# Altium PCB RevC.PcbDoc (part 1 of 2)
Units mm, origin at the board's own origin, x right, y up, seen from the top; angles counter-clockwise.
Board outline 80 x 88.52 mm, 2 copper layers (Top Layer, Bottom Layer); 116 components, 77 nets, 532 pads, 209 vias.
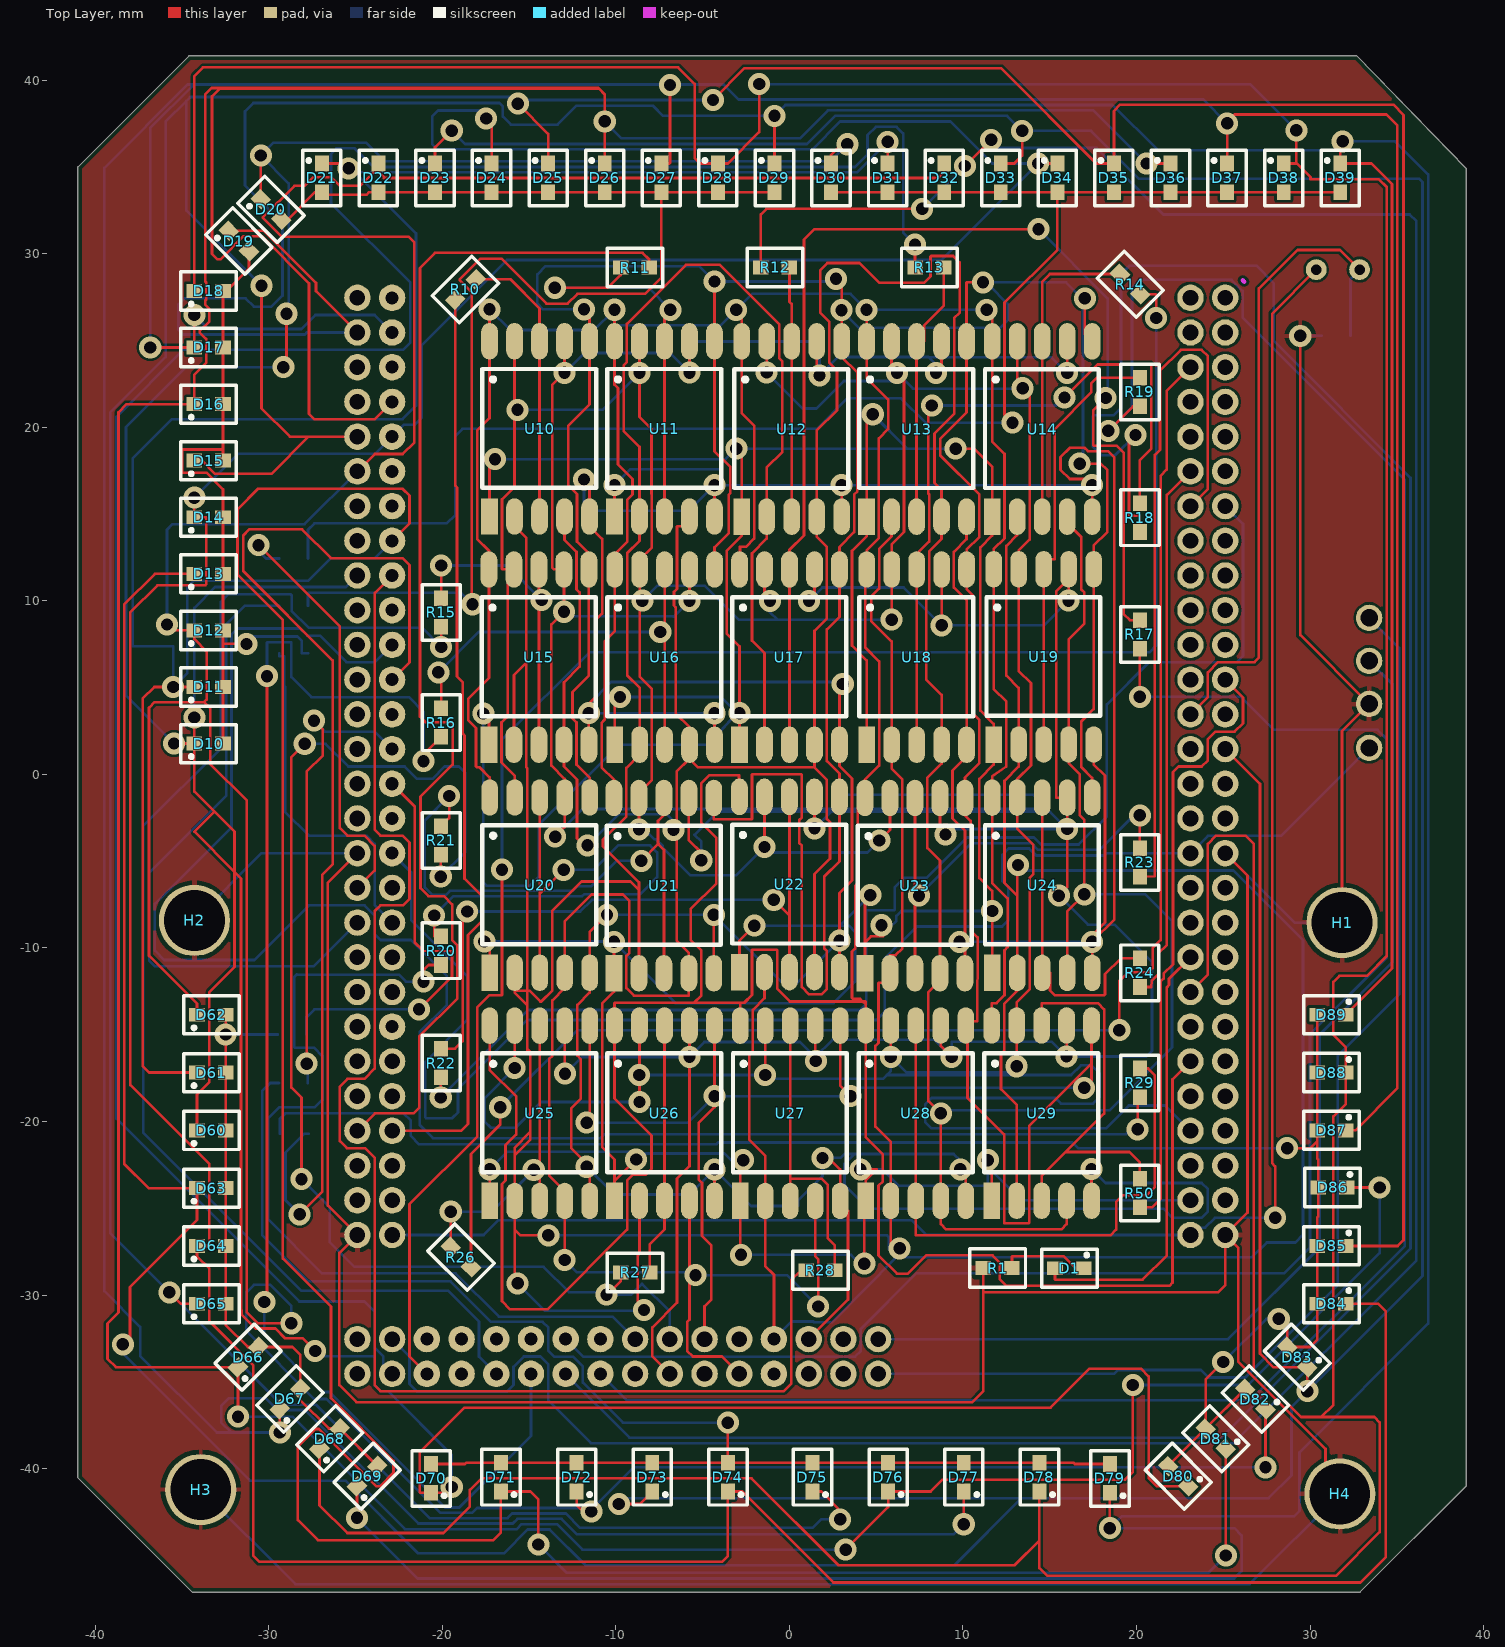
[diagram p0: Top Layer view]
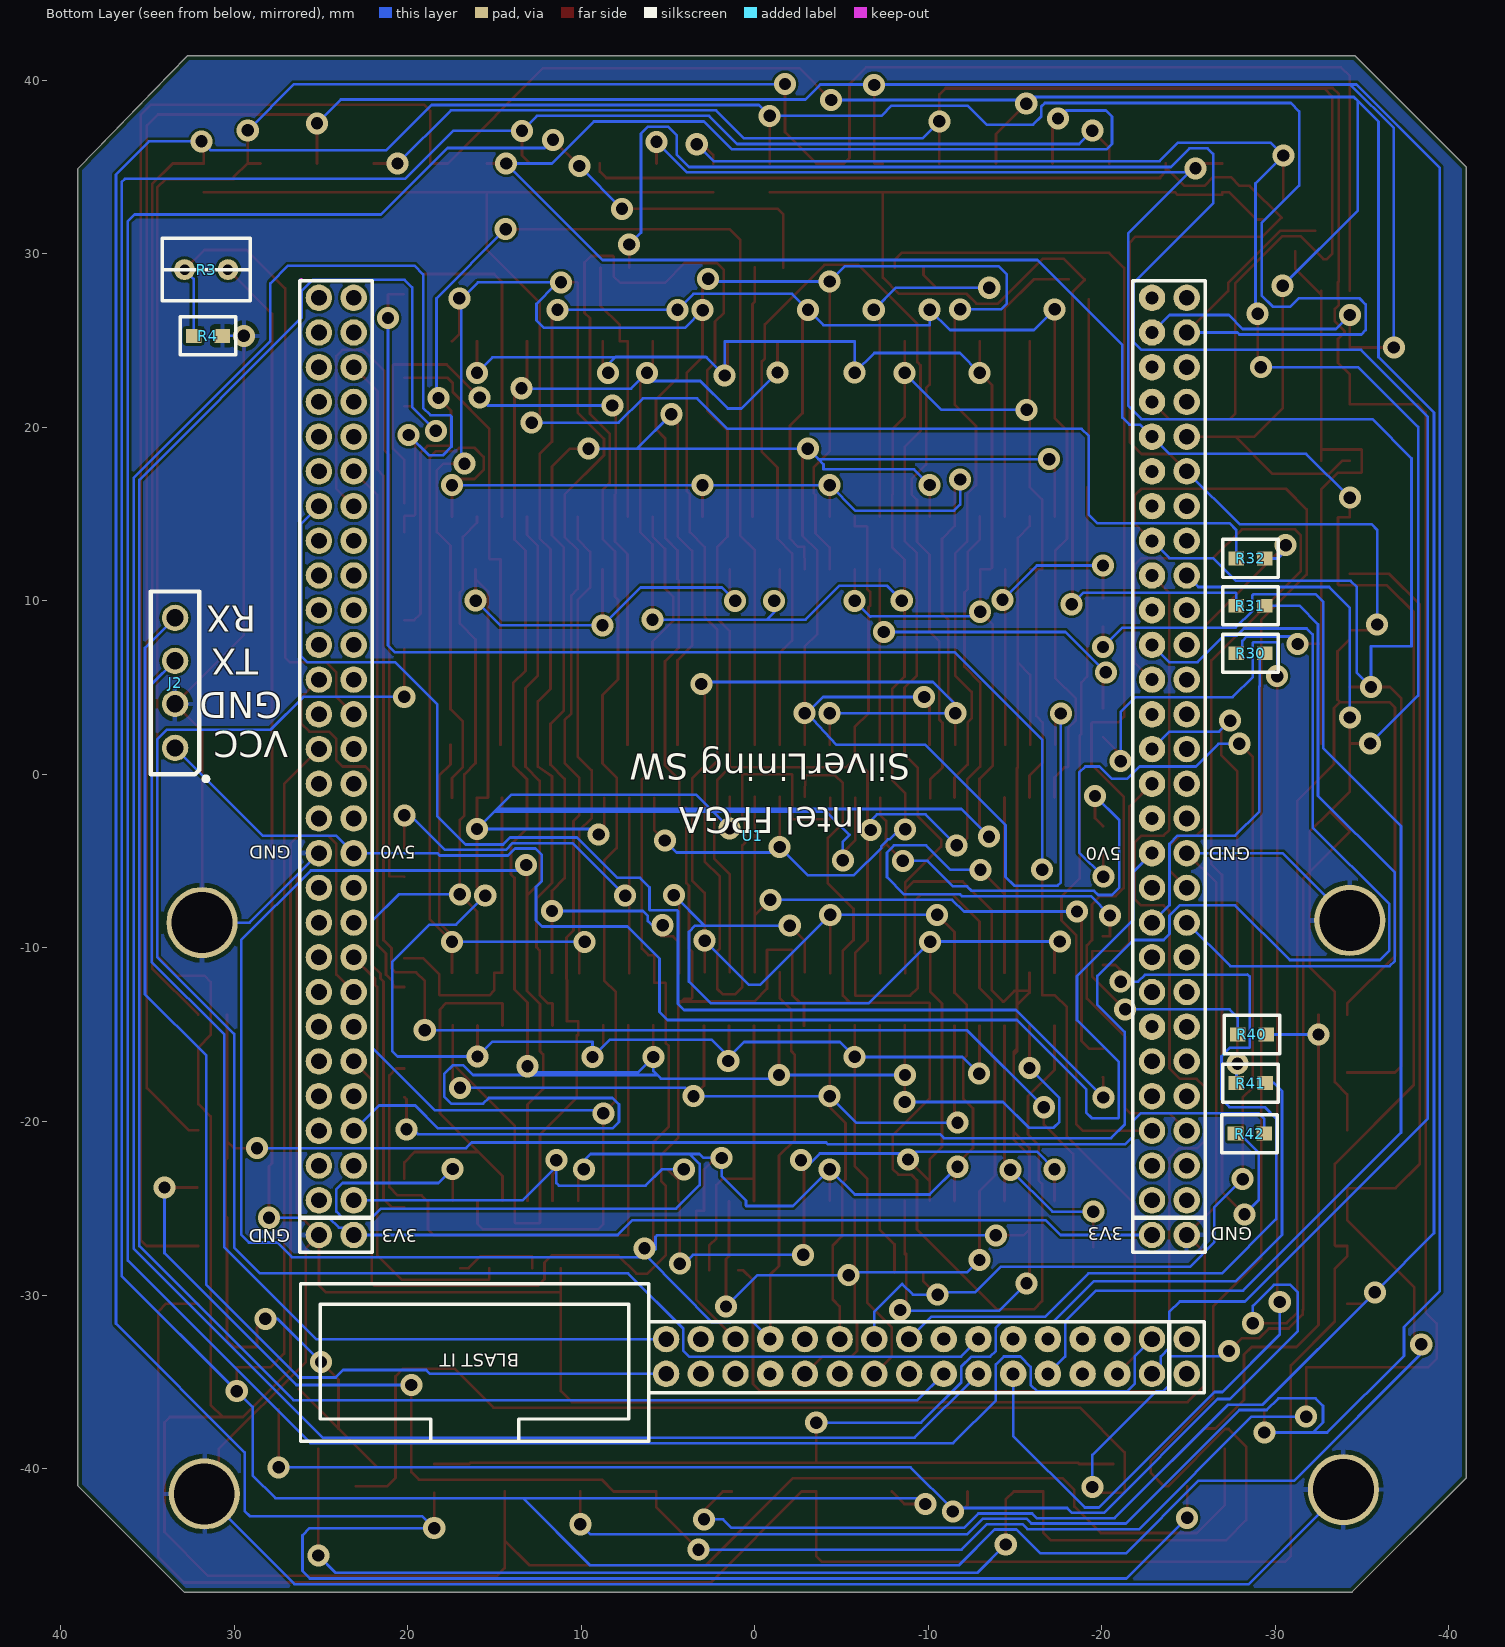
[diagram p1: Bottom Layer view, seen from below]

## Layer stack, top to bottom
Top Solder: solder mask 0.0102, Solder Resist, Dk 3.5
Top Layer: signal copper 0.0356
Dielectric 1: dielectric 0.32, FR-4, Dk 4.8
Bottom Layer: signal copper 0.0356
Bottom Solder: solder mask 0.0102, Solder Resist, Dk 3.5

## Board outline
32.883,-47.117 39,-41 39,34.906 32.701,41.402 -34.598,41.402 -41,35 -41,-40.534 -34.417,-47.117

## Design rules (kind name [scope] priority, off if disabled: settings)
BoardOutlineClearance [All] p1: gap=0.254 ignorepadtopadclearanceinfootprint=FALSE
Clearance [All] p1: gap=0.154 ignorepadtopadclearanceinfootprint=FALSE except(0: SMDPad-Hole THPad-Hole Via-Hole Fill-Hole Poly-Hole Region-Hole Text-Hole)
HoleSize [All] p1: absolutevalues=TRUE maxlimit=10 minlimit=0.381 maxpercent=80.000 minpercent=20.000
HoleToHoleClearance [All] p1: gap=0.481 allowstackedmicrovias=TRUE
MinimumAnnularRing [Not IsVia] p1: minimumring=0.18
MinimumSolderMaskSliver [All] p1: minsoldermaskwidth=0.064
PolygonConnect [All] p1: connectstyle=Relief reliefconductorwidth=0.254 reliefentries=4 polygonreliefangle="90 Angle" airgapwidth=0.254
RoomDefinition LED_Readout_Termination_Resistors [InComponentClass('LED_Readout_Termination_Resistors')] p1: confinementstyle=ConfineIn formatcopy=TRUE lockcomponents=FALSE outline -21.844,-29.972 23.495,-29.972 23.495,32.004 -21.844,32.004
RoomDefinition AFR_Bar_Termination_Resistors [InComponentClass('AFR_Bar_Termination_Resistors')] p2: confinementstyle=ConfineIn formatcopy=TRUE lockcomponents=FALSE outline -30.607,-22.606 -30.607,-12.954 -26.162,-12.954 -26.162,-22.606
RoomDefinition Boost_Bar_Termination_Resistors [InComponentClass('Boost_Bar_Termination_Resistors')] p3: confinementstyle=ConfineIn formatcopy=TRUE lockcomponents=FALSE outline -26.67,14.224 -26.67,5.461 -30.861,5.461 -30.861,14.224
RoomDefinition Uart [InComponentClass('Uart')] p4: confinementstyle=ConfineIn formatcopy=TRUE lockcomponents=FALSE outline 43.688,11.303 43.688,-1.016 24.892,-1.016 24.892,11.303
RoomDefinition Daylight_Sensor_Network [InComponentClass('Daylight_Sensor_Network')] p5: confinementstyle=ConfineIn formatcopy=TRUE lockcomponents=FALSE outline 28.321,31.115 34.417,31.115 34.417,23.622 28.321,23.622
RoomDefinition Core [InComponentClass('Core')] p6: confinementstyle=ConfineIn formatcopy=TRUE lockcomponents=FALSE outline 30.515,-40.494 -28.921,-40.494 -28.921,30.372 30.515,30.372
RoomDefinition Warning_Light [InComponentClass('Warning_Light')] p7: confinementstyle=ConfineIn formatcopy=TRUE lockcomponents=FALSE outline 10.096,-29.714 18.098,-29.714 18.098,-26.539 10.096,-26.539
RoomDefinition LED_Readout [InComponentClass('LED_Readout')] p8: confinementstyle=ConfineIn formatcopy=TRUE lockcomponents=FALSE outline -18.456,-26.737 18.628,-26.737 18.628,26.857 -18.456,26.857
RoomDefinition Hole4 [InComponentClass('Hole4')] p9: confinementstyle=ConfineIn formatcopy=TRUE lockcomponents=FALSE outline 29.428,-44 34,-44 34,-39.174 29.428,-39.174
RoomDefinition Hole3 [InComponentClass('Hole3')] p10: confinementstyle=ConfineIn formatcopy=TRUE lockcomponents=FALSE outline -36.588,-44 -31,-44 -31,-38.158 -36.588,-38.158
RoomDefinition Hole2 [InComponentClass('Hole2')] p11: confinementstyle=ConfineIn formatcopy=TRUE lockcomponents=FALSE outline -36.572,-10.699 -32,-10.699 -32,-6 -36.572,-6
RoomDefinition Hole1 [InComponentClass('Hole1')] p12: confinementstyle=ConfineIn formatcopy=TRUE lockcomponents=FALSE outline 29.428,-11.08 34,-11.08 34,-6 29.428,-6
RoomDefinition Boost_Bar [InComponentClass('Boost_Bar')] p13: confinementstyle=ConfineIn formatcopy=TRUE lockcomponents=FALSE outline -36.043,-0.385 34.569,-0.385 34.569,37.334 -36.043,37.334
RoomDefinition AFR_bar [InComponentClass('AFR_bar')] p14: confinementstyle=ConfineIn formatcopy=TRUE lockcomponents=FALSE outline -35.584,-43 34.852,-43 34.852,-12.368 -35.584,-12.368
RoutingVias [All] p1: holewidth=0.711 width=1.27 viastyle="Through Hole" minholewidth=0.711 minwidth=1.27 maxholewidth=0.711 maxwidth=1.27
SMDNeckDown [All] p1: percent=200.000
SilkToSilkClearance [All] p1: silktosilkclearance=0.152
SilkToSolderMaskClearance [IsPad] p1: minsilkscreentomaskgap=0 clearancetoexposedcopper=TRUE
SolderMaskExpansion [All] p1: expansion=0.102
Width SilkWidth [OnLayer('Top Overlay') or OnLayer('Bottom Overlay')] p1: maxlimit=2.54 minlimit=0.08 preferedwidth=0.127
Width [All] p2: maxlimit=0.2 minlimit=0.152 preferedwidth=0.152
25 further rules are at their usual default settings.

## Classes and differential pairs
component class AFR_Bar_Termination_Resistors: R40 R41 R42
component class AFR_bar: D60 D61 D62 D63 D64 D65 D66 D67 D68 D69 D70 D71 D72 D73 D74 D75 D76 D77 D78 D79 D80 D81 D82 D83 D84 D85 D86 D87 D88 D89
component class Boost_Bar_Termination_Resistors: R30 R31 R32
component class Boost_Bar: D10 D11 D12 D13 D14 D15 D16 D17 D18 D19 D20 D21 D22 D23 D24 D25 D26 D27 D28 D29 D30 D31 D32 D33 D34 D35 D36 D37 D38 D39
component class Core: U1
component class Daylight_Sensor_Network: R3 R4
component class Hole1: H1
component class Hole2: H2
component class Hole3: H3
component class Hole4: H4
component class LED_Readout_Termination_Resistors: R10 R11 R12 R13 R14 R15 R16 R17 R18 R19 R20 R21 R22 R23 R24 R26 R27 R28 R29 R50
component class LED_Readout: U10 U11 U12 U13 U14 U15 U16 U17 U18 U19 U20 U21 U22 U23 U24 U25 U26 U27 U28 U29
component class Uart: J2
component class Warning_Light: D1 R1

## Components (designator, comment, footprint, x,y, rotation, side; value= is the part's Value field where it differs from the comment)
D1 "WARNING" DIODE_0603 16.129,-28.448 r0 top
D10 "" DIODE_0603 -33.465,1.774 r180 top
D11 "" DIODE_0603 -33.465,5.035 r180 top
D12 "" DIODE_0603 -33.465,8.294 r180 top
D13 "" DIODE_0603 -33.465,11.555 r180 top
D14 "" DIODE_0603 -33.465,14.814 r180 top
D15 "" DIODE_0603 -33.465,18.075 r180 top
D16 "" DIODE_0603 -33.465,21.334 r180 top
D17 "" DIODE_0603 -33.465,24.594 r180 top
D18 "" DIODE_0603 -33.465,27.855 r180 top
D19 "" DIODE_0603 -31.725,30.73 r135 top
D20 "" DIODE_0603 -29.874,32.557 r135 top
D21 "" DIODE_0603 -26.945,34.375 r90 top
D22 "" DIODE_0603 -23.684,34.375 r90 top
D23 "" DIODE_0603 -20.424,34.375 r90 top
D24 "" DIODE_0603 -17.164,34.375 r90 top
D25 "" DIODE_0603 -13.904,34.375 r90 top
D26 "" DIODE_0603 -10.644,34.375 r90 top
D27 "" DIODE_0603 -7.384,34.375 r90 top
D28 "" DIODE_0603 -4.125,34.375 r90 top
D29 "" DIODE_0603 -0.864,34.375 r90 top
D30 "" DIODE_0603 2.396,34.375 r90 top
D31 "" DIODE_0603 5.656,34.375 r90 top
D32 "" DIODE_0603 8.916,34.375 r90 top
D33 "" DIODE_0603 12.176,34.375 r90 top
D34 "" DIODE_0603 15.436,34.375 r90 top
D35 "" DIODE_0603 18.695,34.375 r90 top
D36 "" DIODE_0603 21.956,34.375 r90 top
D37 "" DIODE_0603 25.216,34.375 r90 top
D38 "" DIODE_0603 28.476,34.375 r90 top
D39 "" DIODE_0603 31.736,34.375 r90 top
D60 "" DIODE_0603 -33.31,-20.512 r180 top locked
D61 "" DIODE_0603 -33.31,-17.182 r180 top locked
D62 "" DIODE_0603 -33.31,-13.852 r180 top locked
D63 "" DIODE_0603 -33.31,-23.842 r180 top locked
D64 "" DIODE_0603 -33.31,-27.172 r180 top locked
D65 "" DIODE_0603 -33.31,-30.502 r180 top locked
D66 "" DIODE_0603 -31.188,-33.577 r225 top locked
D67 "" DIODE_0603 -28.775,-35.99 r225 top locked
D68 "" DIODE_0603 -26.489,-38.276 r225 top locked
D69 "" DIODE_0603 -24.33,-40.435 r225 top locked
D70 "" DIODE_0603 -20.647,-40.562 r270 top locked
D71 "" DIODE_0603 -16.621,-40.495 r270 top locked
D72 "" DIODE_0603 -12.261,-40.495 r270 top locked
D73 "" DIODE_0603 -7.901,-40.495 r270 top locked
D74 "" DIODE_0603 -3.541,-40.495 r270 top locked
D75 "" DIODE_0603 1.327,-40.495 r270 top locked
D76 "" DIODE_0603 5.687,-40.495 r270 top locked
D77 "" DIODE_0603 10.047,-40.495 r270 top locked
D78 "" DIODE_0603 14.407,-40.495 r270 top locked
D79 "" DIODE_0603 18.469,-40.562 r270 top locked
D80 "" DIODE_0603 22.406,-40.435 r315 top locked
D81 "" DIODE_0603 24.565,-38.276 r315 top locked
D82 "" DIODE_0603 26.851,-35.99 r315 top locked
D83 "" DIODE_0603 29.264,-33.577 r315 top locked
D84 "" DIODE_0603 31.23,-30.495 r0 top locked
D85 "" DIODE_0603 31.23,-27.165 r0 top locked
D86 "" DIODE_0603 31.296,-23.798 r0 top locked
D87 "" DIODE_0603 31.23,-20.505 r0 top locked
D88 "" DIODE_0603 31.23,-17.175 r0 top locked
D89 "" DIODE_0603 31.23,-13.845 r0 top locked
H1 "STANDOFF HOLE" HOLE_3.5MM 31.841,-8.54 r0 top
H2 "STANDOFF HOLE" HOLE_3.5MM -34.286,-8.413 r0 top
H3 "STANDOFF HOLE" HOLE_3.5MM -33.921,-41.206 r0 top
H4 "STANDOFF HOLE" HOLE_3.5MM 31.714,-41.46 r0 top
J2 "CONN HEADER R/A SGL 4POS GOLD (display)" HEADER_4POS_UART 1293.114,-1255.522 r0 bottom
R1 "Figure out ohmage after RevA" RES_0603 12.002,-28.444 r180 top value=100
R3 "Daylight photocell to connect in series forming voltage divider" RES_NSL-19M51 30.353,29.083 r0 bottom
R4 "Figure out ohmage after RevA" RES_0603 31.496,25.273 r0 bottom value=25K
R10 "Figure out ohmage after RevA" RES_0603 -18.669,27.94 r45 top value=100
R11 "Figure out ohmage after RevA" RES_0603 -8.89,29.21 r180 top value=100
R12 "Figure out ohmage after RevA" RES_0603 -0.832,29.206 r0 top value=100
R13 "Figure out ohmage after RevA" RES_0603 8.058,29.206 r0 top value=100
R14 "Figure out ohmage after RevA" RES_0603 19.641,28.243 r135 top value=100
R15 "Figure out ohmage after RevA" RES_0603 -20.062,9.328 r90 top value=100
R16 "Figure out ohmage after RevA" RES_0603 -20.062,2.978 r90 top value=100
R17 "Figure out ohmage after RevA" RES_0603 20.197,8.058 r90 top value=100
R18 "Figure out ohmage after RevA" RES_0603 20.197,14.789 r90 top value=100
R19 "Figure out ohmage after RevA" RES_0603 20.197,22.028 r90 top value=100
R20 "Figure out ohmage after RevA" RES_0603 -20.066,-10.16 r90 top value=100
R21 "Figure out ohmage after RevA" RES_0603 -20.066,-3.81 r90 top value=100
R22 "Figure out ohmage after RevA" RES_0603 -20.066,-16.637 r90 top value=100
R23 "Figure out ohmage after RevA" RES_0603 20.193,-5.08 r90 top value=100
R24 "Figure out ohmage after RevA" RES_0603 20.193,-11.43 r90 top value=100
R26 "Figure out ohmage after RevA" RES_0603 -18.923,-27.813 r135 top value=100
R27 "Figure out ohmage after RevA" RES_0603 -8.89,-28.702 r0 top value=100
R28 "Figure out ohmage after RevA" RES_0603 1.778,-28.575 r0 top value=100
R29 "Figure out ohmage after RevA" RES_0603 20.193,-17.78 r90 top value=100
R30 "Figure out ohmage after RevA" RES_0603 -28.575,6.985 r0 bottom value=100
R31 "Figure out ohmage after RevA" RES_0603 -28.571,9.722 r0 bottom value=100
R32 "Figure out ohmage after RevA" RES_0603 -28.575,12.446 r0 bottom value=100
R40 "Figure out ohmage after RevA" RES_0603 -28.645,-14.99 r180 bottom value=100
R41 "Figure out ohmage after RevA" RES_0603 -28.575,-17.787 r180 bottom value=100
R42 "Figure out ohmage after RevA" RES_0603 -28.518,-20.705 r180 bottom value=100
R50 "Figure out ohmage after RevA" RES_0603 20.193,-24.13 r90 top value=100
U1 "CoreEP3C16" COREEP3C16 0.642,-2.661 r0 bottom locked
U10 "ACSA02-41SURKWA-F01" ACSA02-41SURKWA-F01 -17.279,15.36 r90 top locked
U11 "ACSA02-41SURKWA-F01" ACSA02-41SURKWA-F01 -10.079,15.36 r90 top locked
U12 "ACSA02-41SURKWA-F01" ACSA02-41SURKWA-F01 -2.751,15.352 r90 top locked
U13 "ACSA02-41SURKWA-F01" ACSA02-41SURKWA-F01 4.445,15.352 r90 top locked
U14 "ACSA02-41SURKWA-F01" ACSA02-41SURKWA-F01 11.684,15.352 r90 top locked
U15 "ACSA02-41SURKWA-F01" ACSA02-41SURKWA-F01 -17.313,2.211 r90 top locked
U16 "ACSA02-41SURKWA-F01" ACSA02-41SURKWA-F01 -10.074,2.211 r90 top locked
U17 "ACSA02-41SURKWA-F01" ACSA02-41SURKWA-F01 -2.876,2.211 r90 top locked
U18 "ACSA02-41SURKWA-F01" ACSA02-41SURKWA-F01 4.447,2.211 r90 top locked
U19 "ACSA02-41SURKWA-F01" ACSA02-41SURKWA-F01 11.77,2.219 r90 top locked
U20 "ACSA02-41SURKWA-F01" ACSA02-41SURKWA-F01 -17.272,-10.93 r90 top locked
U21 "ACSA02-41SURKWA-F01" ACSA02-41SURKWA-F01 -10.111,-10.956 r90 top locked
U22 "ACSA02-41SURKWA-F01" ACSA02-41SURKWA-F01 -2.879,-10.892 r90 top locked
U23 "ACSA02-41SURKWA-F01" ACSA02-41SURKWA-F01 4.353,-10.956 r90 top locked
U24 "ACSA02-41SURKWA-F01" ACSA02-41SURKWA-F01 11.684,-10.937 r90 top locked
U25 "ACSA02-41SURKWA-F01" ACSA02-41SURKWA-F01 -17.272,-24.078 r90 top locked
U26 "ACSA02-41SURKWA-F01" ACSA02-41SURKWA-F01 -10.079,-24.064 r90 top locked
U27 "ACSA02-41SURKWA-F01" ACSA02-41SURKWA-F01 -2.837,-24.078 r90 top locked
U28 "ACSA02-41SURKWA-F01" ACSA02-41SURKWA-F01 4.404,-24.07 r90 top locked
U29 "ACSA02-41SURKWA-F01" ACSA02-41SURKWA-F01 11.649,-24.064 r90 top locked

## Footprints (in the part's own frame and the unit in brackets; to place one, negate y for a bottom-side part, rotate by r counter-clockwise, add the part's x,y. Pads: shape width x height; smd on the part's side, far side on the other; paste and mask are expansions set on the pad)
ACSA02-41SURKWA-F01 [mm]
  rect 2.1x0.96 smd: 1(-0.5,0)
  oval 2.1x0.96 smd: 2(-0.5,-1.44) 3(-0.5,-2.88) 4(-0.5,-4.32) 5(-0.5,-5.76) 6(9.6,-5.76) 7(9.6,-4.32) 8(9.6,-2.88) 9(9.6,-1.44) 10(9.6,0)
  silkscreen extent 1.15,-6.15 8,0.42, body extent -0.47,-6.33 9.53,0.57, height 3
COREEP3C16 [mil] "ALTERA Cyclone III FPGA Development Board Full I/O Expander JTAG Interface"
  round 60 hole 35.43: 3V31(-926.55,940.04) 3V32(884.47,940.04) 4(-926.55,625.08) 5(-1005.29,625.08) 5V02(884.47,73.9) 6(-926.55,546.34) 9(-1005.29,546.34) 18(-1005.29,467.6) 19(-926.55,388.86) 20(-1005.29,388.86) 21(-926.55,310.12) 22(-1005.29,310.12) 37(-926.55,231.38) 38(-1005.29,231.38) 39(-926.55,152.64) 41(-1005.29,152.64) 44(-1005.29,-4.84) 46(-1005.29,-83.58) 50(-1005.29,-162.32) 52(-1005.29,-241.06) 56(-1005.29,-319.8) 63(-1005.29,-398.54) 65(-1005.29,-477.28) 69(-1005.29,-556.02) 71(-1005.29,-634.76) 73(-1005.29,-713.5) 78(-1005.29,-792.24) 82(-1005.29,-870.98) 84(-1005.29,-949.73) 86(-1005.29,-1028.47) 93(-1005.29,-1107.21) 95(-1005.29,-1185.95) 100(884.47,-1185.95) 101(963.21,-1185.95) 102(884.47,-1107.21) 103(963.21,-1107.21) 106(884.47,-1028.47) 107(963.21,-1028.47) 108(884.47,-949.73) 110(963.21,-949.73) 111(884.47,-870.98) 112(963.21,-870.98) 113(884.47,-792.24) 114(963.21,-792.24) 117(884.47,-713.5) 118(963.21,-713.5) 119(884.47,-634.76) 120(963.21,-634.76) 126(884.47,-556.02) 127(963.21,-556.02) 128(884.47,-477.28) 131(963.21,-477.28) 132(884.47,-398.54) 133(963.21,-398.54) 134(884.47,-319.8) 135(963.21,-319.8) 137(884.47,-241.06) 139(963.21,-241.06) 142(884.47,-162.32) 143(963.21,-162.32) 144(884.47,-83.58) 145(963.21,-83.58) 146(884.47,-4.84) 147(963.21,-4.84) 148(884.47,152.64) 159(963.21,152.64) 160(884.47,231.38) 161(963.21,231.38) 162(884.47,310.12) 164(963.21,310.12) 166(884.47,388.86) 167(963.21,388.86) 168(884.47,467.6) 169(963.21,467.6) 171(884.47,546.34) 173(963.21,546.34) 174(884.47,625.08) 175(963.21,625.08) 176(884.47,703.82) 177(963.21,703.82) 181(884.47,782.56) 182(963.21,782.56) 183(884.47,861.3) 184(963.21,861.3) 185(175.81,1255) 186(175.81,1176.26) 187(97.07,1255) 188(97.07,1176.26) 189(18.33,1255) 194(18.33,1176.26) 197(-139.15,1255) 198(-139.15,1176.26) 199(-217.89,1255) 200(-217.89,1176.26) 201(-296.63,1255) 202(-296.63,1176.26) 203(-375.37,1255) 207(-375.37,1176.26) 231(-926.55,1255) 232(-926.55,1176.26) 233(-1005.29,1255) 234(-1005.29,1176.26) 235(-1005.29,861.3) 236(-926.55,861.3) 237(-1005.29,782.56) 238(-926.55,782.56) 239(-1005.29,703.82) 240(-926.55,703.82) GND1(-1005.29,940.04) GND2(-1005.29,73.9) GND3(963.21,73.9) GND4(963.21,940.04)
  round 60 hole 29.53: 5V01(-926.55,73.9) 13(-926.55,467.6) 43(-926.55,-4.84) 45(-926.55,-83.58) 49(-926.55,-162.32) 51(-926.55,-241.06) 55(-926.55,-319.8) 57(-926.55,-398.54) 64(-926.55,-477.28) 68(-926.55,-556.02) 70(-926.55,-634.76) 72(-926.55,-713.5) 76(-926.55,-792.24) 81(-926.55,-870.98) 83(-926.55,-949.73) 85(-926.55,-1028.47) 87(-926.55,-1107.21) 94(-926.55,-1185.95) 195(-60.41,1255) 196(-60.41,1176.26) 214(-454.11,1255) 216(-454.11,1176.26) 217(-532.85,1255) 218(-532.85,1176.26) 219(-611.59,1255) 220(-611.59,1176.26) 221(-690.33,1255) 222(-690.33,1176.26) 223(-769.07,1255) 224(-769.07,1176.26) 226(-847.81,1255) 230(-847.81,1176.26)
  Keep-Out Layer lines w10: 1003.06,-1225.56 1006.06,-1222.56
  silkscreen extent -1047,-1225 1007,1407, body extent -1047,-1222 1000,1376, height 394
DIODE_0603 [mm]
  rect 0.9x0.8 smd: 1(-0.826,-0.004) 2(0.826,-0.004)
  silkscreen extent -1.6,-1.1 1.6,1.1, body extent -0.83,-0.45 0.83,0.44, height 0.35
HEADER_4POS_UART [mil] "4 Positions Header, Unshrouded Connector 0.100\" (2.54mm) Through Hole, Right Angle Gold"
  round 60 hole 39.37: 1(-49595,-49490) 2(-49595,-49590) 3(-49595,-49687.5) 4(-49595,-49785)
  silkscreen extent -49670,-49845 -49540,-49415, body extent -49642,-49848 -49228,-49432, height 193
HOLE_3.5MM [mm] ".5"
  round 4.1 hole 3.5: 0(0,0)
RES_0603 [mm]
  rect 0.9x0.8 smd: 1(-0.819,0.004) 2(0.832,0.004)
  silkscreen extent -1.6,-1.1 1.6,1.1, body extent -0.82,-0.44 0.83,0.45, height 0.35
RES_NSL-19M51 [mm]
  round 1.2 hole 0.6: 1(0,0) 2(2.5,0)
  silkscreen extent -1.27,-1.8 3.77,1.8

## Part data
D1 D10 D11 D12 D13 D14 D15 D16 D17 D18 D19 D20 D21 D22 D23 D24 D25 D26 D27 D28 D29 D30 D31 D32 D33 D34 D35 D36 D37 D38 D39 D60 D61 D62 D63 D64 D65 D66 D67 D68 D69 D70 D71 D72 D73 D74 D75 D76 D77 D78 D79 D80 D81 D82 D83 D84 D85 D86 D87 D88 D89: library part LED0, "Typical INFRARED GaAs LED", LatestRevisionDate=08-Jul-2005, LatestRevisionNote="Mech Layer 1 removed.", PackageDescription="LED; 2 Leads", PackageReference=LED-0, Published=8-Jun-2000, Publisher="Altium Limited"
J2: "http://multimedia.3m.com/mws/media/548122O/3mtm-pin-strip-header-ts2182.pdf", Supplier Part Number 1=3M9469-ND, Supplier 1=Digi-Key
R1 R4 R10 R11 R12 R13 R14 R15 R16 R17 R18 R19 R20 R21 R22 R23 R24 R26 R27 R28 R29 R30 R31 R32 R40 R41 R42 R50: library part Res1, "Resistor", LatestRevisionDate=17-Jul-2002, LatestRevisionNote="Re-released for DXP Platform.", PackageDescription="Axial Device, Thru-Hole; 2 Leads; 0.3 in Pin Spacing", PackageReference=AXIAL-0.3, Published=8-Jun-2000, Publisher="Altium Limited"
R3: library part "PHOTOCELL 16-33KOHM", "http://media.digikey.com/pdf/Data%20Sheets/Photonic%20Detetectors%20Inc%20PDFs/PDV-P8103.pdf", Supplier Part Number 1=PDV-P8103-ND, Supplier 1=Digi-Key
U1: "Intel FPGA Core"
U10 U11 U12 U13 U14 U15 U16 U17 U18 U19 U20 U21 U22 U23 U24 U25 U26 U27 U28 U29: "Surface Mount Display", Supplier 1=Digi-Key

## Via types
v1: diameter 1.27, hole 0.711, Top Layer to Bottom Layer, 209 vias

## Nets (pads, with @x,y where several pads share a name; then routed paths per layer and width w, separated by ;. In a path a pad name is that pad's centre, name@x,y a point inside that pad or via, vN(x,y) a via of type N, cw(c..) or ccw(c..) an arc to the next point about the centre after c; other vN are vias at no path point)
3V3: R3.1 U1.3V31 U1.3V32 | length 108
  Top Layer w0.152: v1(27.991,-25.546) 27.991,-22.582 27.811,-22.403 27.811,26.541 R3.1@30.353,29.083
  Bottom Layer w0.152: U1.3V31@-22.892,-26.538 -17.623,-26.538 -16.764,-25.679 7.039,-25.679 7.898,-26.538 U1.3V32@23.108,-26.538 23.108,-26.111 23.952,-26.111 24.517,-25.546 v1(27.991,-25.546)
5V0: J2.1 U1.5V01 U1.5V02 | length 86.9
  Bottom Layer w0.152: U1.5V01@-22.892,-4.538 -21.793,-5.637 -21.793,-8.387 -18.567,-11.613 -18.567,-14.16 -20.98,-16.573 -20.98,-19.763 -20.931,-19.812 -19.431,-19.812 -19.101,-19.482 -19.101,-18.136 -15.113,-14.148 5.016,-14.148 5.486,-13.678 5.486,-10.617 7.341,-8.763 12.255,-8.763 12.598,-8.42 12.598,-6.477 12.268,-6.147 12.268,-4.635 12.636,-4.267 13.815,-4.267 14.222,-4.674 18.152,-4.674 18.287,-4.538 U1.5V02@23.108,-4.538 24.105,-3.542 28.335,-3.542 J2.1@33.401,1.524
C0: R10.2 U10.3 U10.8 | length 16.4
  Top Layer w0.152: R10.2@-18.083,28.531 -16.084,28.531 -14.399,26.846 U10.8@-14.399,24.96 U10.3@-14.399,14.86
C0/IO_VB8N3_240: R10.1 U1.240 | length 53
  Top Layer w0.152: U1.240@-22.892,-20.538 -18.913,-20.538 -18.517,-20.142 -18.517,-9.26 -17.678,-8.422 -17.678,-7.044 -18.72,-6.002 -18.72,2.241 -18.821,2.343 -18.821,5.309 -19.152,5.639 -19.152,16.535 -19.251,16.634 R10.1@-19.251,27.363
C1: R11.2 U11.3 U11.8 | length 23.8
  Top Layer w0.152: v1(-13.513,28.042) -10.459,28.042 -9.722,28.778 R11.2@-9.722,29.206 ; U11.3@-7.199,14.86 U11.8@-7.199,24.96 -7.199,26.431 v1(-6.858,26.772)
  Bottom Layer w0.152: v1(-13.513,28.042) -8.128,28.042 v1(-6.858,26.772)
C1/IO_VB8N3_239: R11.1 U1.239 | length 71.4
  Top Layer w0.152: U1.239@-24.892,-20.538 -23.886,-19.533 -21.653,-19.533 -21.336,-19.215 -21.336,-15.113 -19.133,-12.91 -19.133,-9.847 -19.433,-9.547 -19.433,-7.493 -19.906,-7.02 -20.795,-7.02 -21.26,-6.555 -21.26,-1.284 -19.406,0.57 -19.406,2.946 -19.456,2.997 -20.955,2.997 -21.287,3.329 -21.287,29.183 -20.422,30.048 -8.465,30.048 -8.071,29.654 R11.1@-8.071,29.206
C2: R12.2 U12.3 U12.8 | length 14.4
  Top Layer w0.152: R12.2@0,29.21 0,27.231 0.129,27.102 U12.8@0.129,24.952 U12.3@0.129,14.852
C2/IO_VB8N2_232: R12.1 U1.232 | length 174.7
  Top Layer w0.152: R12.1@-1.651,29.21 -1.651,32.271 -1.333,32.588 v1(7.645,32.588) ; v1(10.109,35.052) v1(11.62,36.563)
  Bottom Layer w0.152: U1.232@-22.892,-32.538 -21.892,-33.538 -21.892,-35.115 -21.448,-35.56 -16.281,-35.56 -15.9,-35.178 -15.9,-34.135 -15.303,-33.538 -14.351,-33.538 -13.894,-33.996 -13.894,-36.068 -11.43,-38.532 25.597,-38.532 36.119,-28.01 36.119,31.877 35.738,32.258 21.539,32.258 17.704,36.093 12.09,36.093 v1(11.62,36.563) ; v1(7.645,32.588) v1(10.109,35.052)
C3: R13.2 U13.3 U13.8 | length 15.3
  Top Layer w0.152: U13.3@7.325,14.852 U13.8@7.325,24.952 7.772,24.952 7.772,25.883 8.89,27 R13.2@8.89,29.21
C3/IO_VB8N2_231: R13.1 U1.231 | length 138.7
  Top Layer w0.152: R13.1@7.239,29.21 v1(7.239,30.531)
  Bottom Layer w0.152: U1.231@-22.892,-34.538 -23.401,-34.029 -23.401,-33.531 -23.884,-33.048 -23.884,-30.988 -24.498,-30.375 -28.24,-30.375 -38.786,-19.829 -38.786,20.606 -34.931,24.46 -22.276,24.46 -21.844,24.892 -21.844,28.335 -26.416,32.907 -26.416,35.748 -26.094,36.07 -25.046,36.07 -23.977,35 3.773,35 4.496,35.723 4.496,36.83 4.98,37.314 6.171,37.314 6.553,36.932 6.553,31.217 v1(7.239,30.531)
C4: R14.2 U14.3 U14.8 | length 18.2
  Top Layer w0.152: U14.3@14.564,14.852 U14.8@14.564,24.952 14.564,28.384 15.009,28.829 R14.2@19.05,28.829
C4/IO_VB8N2_226: R14.1 U1.226 | length 100.7
  Top Layer w0.152: U1.226@-20.892,-34.538 -21.895,-33.536 -21.895,-24.763 -17.983,-20.851 -17.983,-13.411 -17.297,-12.725 -16.586,-12.725 -16.561,-12.7 v1(-16.561,-5.486) ; R14.1@20.217,27.662 21.107,27.662 21.133,27.636 v1(21.133,26.301)
  Bottom Layer w0.152: v1(-16.561,-5.486) -16.561,2.007 -11.532,7.036 20.739,7.036 21.133,7.429 v1(21.133,26.301)
C5: R15.2 U15.3 U15.8 | length 18.8
  Top Layer w0.152: R15.2@-20.066,10.16 v1(-20.066,12.04) ; U15.3@-14.433,1.711 v1@-14.433,10.217 ; U15.8@-14.433,11.811 v1@-14.433,10.217 ; v1(-14.275,10.058) v1@-14.433,10.217
  Bottom Layer w0.152: v1(-20.066,12.04) -16.256,12.04 v1(-14.275,10.058)
C5/IO_VB8N2_221: R15.1 U1.221 | length 75.6
  Top Layer w0.152: v1(-20.066,7.341) R15.1@-20.066,8.509
  Bottom Layer w0.152: v1(-20.066,7.341) -21.184,8.458 -27.707,8.458 -28.677,9.428 -28.677,10.312 -28.753,10.389 -32.322,10.389 -32.766,9.944 -32.766,1.499 -37.236,-2.972 -37.236,-20.642 -28.135,-29.743 -19.662,-29.743 -17.884,-31.521 -17.884,-33.546 U1.221@-16.892,-34.538
C6: R16.2 U16.3 U16.8 | length 26.3
  Top Layer w0.152: v1(-20.231,5.88) -20.066,5.715 R16.2@-20.066,3.81 ; v1(-7.442,8.204) v1@-7.194,8.452 ; U16.3@-7.194,1.711 v1@-7.194,8.452 ; U16.8@-7.194,11.811 v1@-7.194,8.452
  Bottom Layer w0.152: v1(-20.231,5.88) -17.907,8.204 v1(-7.442,8.204)
C6/IO_VB8N1_219: R16.1 U1.219 | length 81.2
  Top Layer w0.152: v1(-30.251,-30.404) -30.099,-30.251 v1(-30.099,5.664) ; v1(-21.082,0.762) -21.082,1.143 R16.1@-20.066,2.159
  Bottom Layer w0.152: v1(-30.251,-30.404) -30.251,-32.283 -26.949,-35.585 -26.492,-35.585 -19.837,-42.24 -19.025,-42.24 -14.892,-38.108 U1.219@-14.892,-34.538 ; v1(-30.099,5.664) -30.099,7.595 -30.074,7.62 -28.727,7.62 -28.702,7.595 -28.702,5.613 -27.542,4.454 -21.929,4.454 -21.082,3.607 v1(-21.082,0.762)
C7: R17.2 U17.3 U17.8 | length 70
  Top Layer w0.152: U17.3@0.004,1.711 U17.8@0.004,11.811 0.004,12.944 0.839,13.779 0.839,30.81 1.449,31.42 v1(14.351,31.42) ; v1(18.224,21.692) 17.501,20.968 17.501,18.985 17.551,18.934 18.864,18.934 19.256,18.542 19.256,9.255 19.621,8.89 R17.2@20.193,8.89
  Bottom Layer w0.152: v1(14.351,31.42) 18.339,27.432 18.339,21.806 v1(18.224,21.692)
C7/IO_VB8N0_218: R17.1 U1.218 | length 95.8
  Top Layer w0.152: v1(20.193,4.47) R17.1@20.193,7.239
  Bottom Layer w0.152: U1.218@-12.892,-32.538 -11.884,-33.546 3.779,-33.546 4.115,-33.21 4.115,-31.941 7.302,-28.753 28.494,-28.753 29.997,-27.249 29.997,-14.961 34.417,-10.541 34.417,2.032 33.884,2.565 27.915,2.565 26.011,4.469 v1(20.193,4.47) v1(20.193,4.47)
C8: R18.2 U18.3 U18.8 | length 41.8
  Top Layer w0.152: U18.3@7.327,1.711 U18.8@7.327,11.811 7.327,12.686 8.052,13.411 8.052,16.129 8.001,16.18 8.001,21.057 v1(8.204,21.26) ; v1(15.85,21.717) 17.755,23.622 20.803,23.622 20.853,23.571 20.853,18.771 20.193,18.11 R18.2@20.193,15.621
  Bottom Layer w0.152: v1(8.204,21.26) 15.392,21.26 v1(15.85,21.717)
C8/IO_VB8N0_217: R18.1 U1.217 | length 143.8
  Top Layer w0.152: v1(19.939,19.558) 19.563,19.182 19.563,14.961 19.614,14.91 20.168,14.91 20.193,14.884 R18.1@20.193,13.97
  Bottom Layer w0.152: U1.217@-12.892,-34.538 -9.214,-38.216 24.894,-38.216 35.789,-27.321 35.789,17.091 27.913,24.967 27.913,28.297 26.899,29.312 19.609,29.312 19.101,28.804 19.101,21.107 18.694,20.701 17.551,20.701 17.475,20.625 17.475,18.885 17.97,18.39 18.771,18.39 v1(19.939,19.558)
C9: R19.2 U19.3 U19.8 | length 25.2
  Top Layer w0.152: U19.3@14.65,1.719 U19.8@14.65,11.819 14.65,12.395 15.265,12.395 15.291,12.421 15.291,19.915 17.399,22.023 17.399,22.543 17.716,22.86 R19.2@20.193,22.86
C9/IO_VB8N0_214: R19.1 U1.214 | length 127.6
  Top Layer w0.152: v1(18.377,19.799) 19.787,21.209 R19.1@20.193,21.209
  Bottom Layer w0.152: U1.214@-10.892,-34.538 -9.375,-36.055 26.576,-36.055 35.458,-27.173 35.458,16.967 26.111,26.314 26.111,27.862 25.474,28.499 20.168,28.499 19.736,28.067 19.736,21.158 v1(18.377,19.799)
C10: R20.2 U20.3 U20.8 | length 35
  Top Layer w0.152: v1(-20.472,-8.128) -20.472,-9.328 R20.2@-20.07,-9.328 ; U20.3@-14.392,-11.43 -14.392,-6.886 ; U20.8@-14.392,-1.33 -14.392,-6.886 ; v1(-13.005,-5.499) -14.392,-6.886
  Bottom Layer w0.152: v1(-20.472,-8.128) -19.364,-7.02 -11.938,-7.02 -11.827,-6.909 -8.611,-6.909 -7.62,-5.918 -7.62,-4.496 -8.026,-4.089 -9.868,-4.089 -11.278,-5.499 v1(-13.005,-5.499)
C10/IO_VB7N3_207: R20.1 U1.207 | length 51.3
  Top Layer w0.152: v1(-21.082,-11.938) -21.082,-11.278 -20.783,-10.979 R20.1@-20.07,-10.979
  Bottom Layer w0.152: v1(-21.082,-11.938) -22.089,-11.938 -22.481,-11.546 -28.383,-11.546 -28.397,-11.532 -28.524,-11.659 -28.524,-15.723 -28.499,-15.748 -27.394,-15.748 -26.899,-16.243 -26.899,-18.732 -27.343,-19.177 -29.388,-19.177 -30.048,-19.837 -30.048,-25.625 -26.92,-28.753 -19.228,-28.753 -16.741,-31.24 -10.191,-31.24 U1.207@-8.892,-32.538
C11: R21.2 U21.3 U21.8 | length 34.4
  Top Layer w0.152: R21.2@-20.07,-2.978 -19.609,-2.517 v1(-19.609,-1.245) ; v1(-8.533,-4.985) -7.569,-3.997 ; U21.3@-7.231,-11.456 -7.231,-4.348 -7.563,-4.015 -7.545,-3.997 -7.569,-3.997 ; U21.8@-7.231,-1.356 -7.231,-2.335 -7.569,-2.673 ; -7.569,-3.997 -7.569,-2.673 ; -7.569,-3.997 -7.563,-3.997 -7.569,-2.673
  Bottom Layer w0.152: v1(-19.609,-1.245) -21.006,-2.642 -21.006,-6.515 -20.576,-6.945 -19.794,-6.945 -19.562,-6.713 -12.505,-6.713 -12.237,-6.446 -11.423,-6.446 -9.961,-4.985 v1(-8.533,-4.985)
C11/IO_VB7N3_202: R21.1 R27.1 U1.202 | length 73.6
  Top Layer w0.152: v1(-28.118,-23.317) -28.118,-18.629 -28.702,-18.045 -28.702,0.991 v1(-27.927,1.765) ; v1(-20.091,-5.893) -20.091,-4.629 R21.1@-20.07,-4.629 ; R27.1@-9.709,-28.698 -9.709,-29.191 v1@-10.49,-29.972 ; v1@-10.49,-29.972 -10.541,-30.023 v1(-10.541,-29.972) v1@-10.49,-29.972
  Bottom Layer w0.152: v1(-28.118,-23.317) -26.477,-24.958 -26.477,-26.965 -25.07,-28.372 -14.173,-28.372 -12.713,-29.832 v1@-10.351,-29.832 ; v1(-27.927,1.765) -26.721,1.765 -25.413,0.457 -22.174,0.457 -21.463,-0.254 -20.574,-0.254 -19.863,0.457 -19.05,0.457 -18.694,0.102 -18.694,-4.496 v1(-20.091,-5.893) ; v1(-10.541,-29.972) -9.114,-29.972 -8.494,-29.352 -6.892,-30.954 U1.202@-6.892,-32.538
C12: R22.2 U22.3 U22.8 | length 38.3
  Top Layer w0.152: R22.2@-20.07,-15.805 -19.272,-15.805 -18.826,-15.359 -18.826,-8.158 v1(-18.567,-7.899) ; v1(-0.903,-7.225) 0.001,-8.129 ; U22.3@0.001,-11.392 0.001,-8.129 ; U22.8@0.001,-1.292 0.001,-8.129
  Bottom Layer w0.152: v1(-18.567,-7.899) -12.056,-7.899 -11.381,-7.225 v1(-0.903,-7.225)
C12/IO_VB4N0_118: R22.1 U1.118 | length 75
  Top Layer w0.152: v1(-20.091,-18.618) -20.091,-17.456 R22.1@-20.07,-17.456
  Bottom Layer w0.152: v1(-20.091,-18.618) -15.05,-13.576 4.072,-13.576 4.42,-13.229 4.42,-7.877 4.47,-7.826 6.042,-7.826 6.062,-7.807 6.062,-6.507 6.604,-5.964 7.904,-5.964 10.236,-3.632 14.087,-3.632 14.493,-4.039 16.662,-4.039 18.288,-2.413 18.288,4.039 20.703,6.454 25.771,6.454 26.137,6.82 26.137,14.433 U1.118@25.108,15.462
C13: R23.2 U23.3 U23.8 | length 27.3
  Top Layer w0.152: U23.3@7.233,-11.456 v1@7.233,-6.75 ; U23.8@7.233,-1.356 v1@7.233,-6.75 ; v1(7.468,-6.985) v1@7.233,-6.75 ; R23.2@20.189,-4.248 v1(20.189,-2.362)
  Bottom Layer w0.152: v1(7.468,-6.985) 10.492,-3.961 13.943,-3.961 14.327,-4.345 17.856,-4.345 19.839,-2.362 v1(20.189,-2.362)
C13/IO_VB4N0_117: R23.1 U1.117 | length 42.6
  Top Layer w0.152: R23.1@20.189,-5.899 21.058,-5.872 21.058,18.408 21.355,18.706 21.355,23.26 22.555,24.46 23.749,24.46 24.105,24.105 24.105,16.458 U1.117@23.108,15.462
C14: R24.2 U24.3 U24.8 | length 18.4
  Top Layer w0.152: U24.8@14.564,-1.337 U24.3@14.564,-11.437 15.011,-11.437 15.011,-12.446 15.291,-12.725 18.136,-12.725 18.186,-12.675 18.186,-11.506 19.095,-10.598 R24.2@20.189,-10.598
C14/IO_VB4N0_113: R24.1 U1.113 | length 31.3
  Top Layer w0.152: R24.1@20.189,-12.249 20.839,-12.249 20.87,-11.91 21.246,-11.534 21.246,-10.326 21.742,-9.83 21.742,16.096 U1.113@23.108,17.462
C15: R26.2 U25.3 U25.8 | length 18.4
  Top Layer w0.152: R26.2@-19.514,-27.227 v1(-19.514,-25.197) ; v1(-14.732,-22.784) v1@-14.392,-23.124 ; U25.3@-14.392,-24.578 v1@-14.392,-23.124 ; U25.8@-14.392,-14.478 v1@-14.392,-23.124
  Bottom Layer w0.152: v1(-19.514,-25.197) -17.145,-25.197 v1(-14.732,-22.784)
C15/IO_VB4N2_106: R26.1 U1.106 | length 88
  Top Layer w0.152: R26.1@-18.346,-28.395 -18.346,-21.869 -16.662,-20.185 v1(-16.662,-19.177) ; v1(19.012,-14.732) 19.012,-11.9 19.507,-11.405 20.689,-11.405 20.93,-11.164 20.93,-10.008 21.387,-9.551 21.387,17.207 21.739,17.559 21.739,22.092 U1.106@23.108,23.462
  Bottom Layer w0.152: v1(-16.662,-19.177) -12.217,-14.732 v1(19.012,-14.732)
C16: R27.2 U26.3 U26.8 | length 14.6
  Top Layer w0.152: R27.2@-8.058,-28.698 -8.058,-27.076 -7.199,-26.217 U26.3@-7.199,-24.564 U26.8@-7.199,-14.464
C17: R28.2 U27.3 U27.8 | length 17.5
  Top Layer w0.152: U27.3@0.043,-24.578 0.043,-23.317 ; U27.8@0.043,-14.478 0.043,-23.317 ; R28.2@2.61,-28.571 2.61,-27.127 2.21,-26.727 2.21,-23.66 1.841,-23.292 0.068,-23.292 0.043,-23.317
C17/IO_VB3N3_68: R28.1 U1.68 | length 84.5
  Top Layer w0.152: U1.68@-22.892,11.462 -23.892,10.462 -23.892,-3.197 -23.558,-3.531 -22.288,-3.531 -21.895,-3.924 -21.895,-7.175 -22.263,-7.544 -23.558,-7.544 -23.9,-7.885 -23.9,-16.949 -24.497,-17.546 -25.463,-17.546 -25.908,-17.991 -25.908,-21.122 -25.499,-21.531 -24.459,-21.531 -23.892,-22.098 -23.892,-35.201 -23.558,-35.535 -0.318,-35.535 0.102,-35.115 0.102,-29.13 0.66,-28.571 R28.1@0.959,-28.571
C18: R29.2 U28.3 U28.8 | length 35.4
  Top Layer w0.152: U28.8@7.284,-14.47 U28.3@7.284,-24.57 7.284,-26.543 18.491,-26.556 18.821,-26.226 18.821,-24.638 19.202,-24.257 20.574,-24.257 21.057,-23.774 21.057,-17.335 20.669,-16.948 R29.2@20.189,-16.948
C18/IO_VB2N3_57: R29.1 U1.57 | length 104.4
  Top Layer w0.152: v1(20.066,-20.447) 20.066,-18.722 R29.1@20.189,-18.599
  Bottom Layer w0.152: U1.57@-22.892,7.462 -23.884,6.469 -25.519,6.469 -27.049,7.999 -27.779,7.999 -28.187,8.407 -31.802,8.407 -32.145,8.064 -32.145,-3.048 -36.566,-7.468 -36.566,-10.157 -36.03,-10.693 -30.836,-10.693 -27.686,-7.544 -24.483,-7.544 -23.9,-8.127 -23.9,-9.197 -23.558,-9.538 -21.818,-9.538 -19.744,-11.612 -19.744,-13.277 -21.311,-14.844 -21.311,-20.187 -20.542,-20.955 -10.897,-20.955 -10.668,-20.726 19.402,-20.726 19.681,-20.447 v1(20.066,-20.447)
C19: R50.2 U29.3 U29.8 | length 23
  Top Layer w0.152: U29.3@14.529,-24.564 14.529,-23.144 15.916,-21.757 ; U29.8@14.529,-14.464 14.529,-13.208 14.554,-13.183 17.776,-13.183 18.136,-13.542 18.136,-19.537 15.916,-21.757 ; R50.2@20.189,-23.298 20.189,-22.35 19.596,-21.757 15.916,-21.757
C19/IO_VB5N2_135: R50.1 U1.135 | length 35.1
  Top Layer w0.152: R50.1@20.189,-24.949 20.892,-24.949 21.387,-24.454 21.387,-11.938 21.565,-11.76 21.565,-11.481 22.098,-10.947 22.098,0.127 22.428,0.457 23.749,0.457 24.105,0.813 24.105,2.032 24.536,2.464 25.654,2.464 26.137,2.946 26.137,4.433 U1.135@25.108,5.462
C_a/IO_VB7N2_201: U1.201 U10.7 U11.7 U12.7 U13.7 U14.7 U15.7 U16.7 U17.7 U18.7 U19.7 U20.7 U21.7 U22.7 U23.7 U24.7 U25.7 U26.7 U27.7 U28.7 U29.7 | length 293.4
  Top Layer w0.152: v1(-13.502,-3.583) -12.952,-3.033 U20.7@-12.952,-1.33 -12.952,-0.254 -13.716,0.51 -13.716,8.65 v1(-12.993,9.373) U15.7@-12.993,11.811 -13.568,11.811 -13.669,11.912 -13.669,22.429 v1(-12.959,23.139) U10.7@-12.959,24.96 ; U25.7@-12.952,-14.478 -12.952,-17.223 v1(-12.929,-17.247) ; U1.201@-6.892,-34.538 -7.899,-33.531 -7.899,-31.856 -6.477,-30.434 -6.477,-23.292 -5.759,-22.574 v1(-5.759,-16.276) U26.7@-5.759,-14.464 ; U21.7@-5.791,-1.356 -5.791,-3.803 -5.08,-4.514 v1(-5.08,-4.953) ; v1(-5.759,23.148) U11.7@-5.759,24.96 ; v1(-5.754,9.999) U16.7@-5.754,11.811 ; v1(1.126,9.999) 1.444,10.316 U17.7@1.444,11.811 ; v1(1.441,-3.104) U22.7@1.441,-1.292 ; v1@1.479,-16.286 1.483,-16.29 U27.7@1.483,-14.478 ; U12.7@1.569,24.952 1.569,23.145 v1(1.734,22.981) ; v1(8.447,23.14) 8.765,23.457 U13.7@8.765,24.952 ; U23.7@8.673,-1.356 8.673,-3.148 v1(8.99,-3.465) ; U28.7@8.724,-14.47 8.724,-15.658 v1(9.347,-16.281) ; v1(8.767,8.585) U18.7@8.767,11.811 ; v1(15.528,-6.987) 16.004,-6.51 v1(16.004,-3.148) U24.7@16.004,-1.337 15.392,-1.337 15.367,-1.312 15.367,10.529 U19.7@16.09,11.252 ; v1(15.969,-16.256) U29.7@15.969,-14.464 ; v1(16.002,23.139) 16.004,23.141 U14.7@16.004,24.952 ; v1(16.078,10.008) 16.09,10.019 U19.7@16.09,11.252 ; U19.7@16.09,11.819 U19.7@16.09,11.252
  Bottom Layer w0.152: v1(-13.502,-3.583) -11.915,-1.996 2.549,-1.996 ; v1(-12.993,9.373) -12.739,9.119 -6.721,9.119 -6.677,9.076 v1(-5.754,9.999) ; v1(-12.959,23.139) -11.816,24.282 -6.893,24.282 v1(-5.759,23.148) -5.759,24.943 1.734,24.943 v1(1.734,22.981) 2.781,24.028 ; v1(-12.929,-17.247) -11.963,-16.281 -5.764,-16.281 v1(-5.759,-16.276) -4.901,-15.418 0.611,-15.418 1.479,-16.286 2.474,-15.291 8.357,-15.291 v1(9.347,-16.281) 9.347,-15.4 15.113,-15.4 v1(15.969,-16.256) 20.574,-16.256 20.892,-15.938 20.892,-10.806 18.742,-8.657 17.198,-8.657 v1(15.528,-6.987) ; v1(-5.08,-4.953) -5.08,-3.879 -5.473,-3.486 -4.147,-2.159 2.386,-2.159 ; v1(1.126,9.999) 1.897,10.77 6.583,10.77 v1(8.767,8.585) 14.656,8.585 v1(16.078,10.008) ; v1(1.441,-3.104) 2.386,-2.159 ; v1(8.447,23.14) 8.447,23.622 8.041,24.028 ; v1(8.99,-3.465) 9.308,-3.148 v1(16.004,-3.148) 15.015,-2.159 ; v1(16.002,23.139) 15.113,24.028 8.041,24.028 ; 2.386,-2.159 15.015,-2.159 ; 2.386,-2.159 2.549,-1.996 ; 2.549,-1.996 3.377,-1.168 14.025,-1.168 14.853,-1.996 ; 2.549,-1.996 14.853,-1.996 ; 2.781,24.028 2.807,24.054 8.016,24.054 8.041,24.028 ; 2.781,24.028 8.041,24.028 ; 14.853,-1.996 15.015,-2.159
  other v1: 1.524,-16.51
C_b/IO_VB7N2_200: U1.200 U10.6 U11.6 U12.6 U13.6 U14.6 U15.6 U16.6 U17.6 U18.6 U19.6 U20.6 U21.6 U22.6 U23.6 U24.6 U25.6 U26.6 U27.6 U28.6 U29.6 | length 322.5
  Top Layer w0.152: v1(-11.837,26.797) -11.519,26.479 U10.6@-11.519,24.96 -11.519,21.311 -12.751,20.079 -12.751,16.662 -12.243,16.154 -12.243,13.411 -11.553,12.721 U15.6@-11.553,11.811 -11.553,5.69 -12.497,4.746 -12.497,3.226 -12.268,2.997 -12.268,0.566 -11.512,-0.191 U20.6@-11.512,-1.33 ; v1(-11.684,-20.066) -11.512,-19.894 U25.6@-11.512,-14.478 ; U1.200@-4.892,-32.538 -4.892,-30.648 -4.496,-30.251 -4.496,-27.137 -5.039,-26.594 -5.039,-23.536 -5.232,-23.343 -5.232,-20.09 -4.319,-19.177 v1(-4.318,-18.542) ; U21.6@-4.351,-1.356 -4.351,-2.565 -4.326,-2.591 -2.184,-2.591 -2.159,-2.565 -2.159,-0.025 -2.134,0 0.686,0 0.711,-0.025 0.711,-2.489 0.559,-2.642 0.559,-3.945 0.711,-4.098 0.711,-12.255 1.13,-12.675 1.841,-12.675 2.159,-12.357 2.159,-10.185 2.007,-10.033 2.007,-5.893 2.881,-5.018 U22.6@2.881,-1.292 2.881,0.051 2.159,0.773 2.159,8.357 2.884,9.082 U17.6@2.884,11.811 2.884,13.106 3.734,13.956 3.734,16.129 3.912,16.307 3.912,23.146 3.009,24.049 U12.6@3.009,24.952 v1@3.009,26.734 ; U26.6@-4.319,-14.464 v1(-4.318,-18.542) ; v1(-4.319,28.397) U11.6@-4.319,24.96 -4.319,18.619 -3.404,17.704 -3.404,16.205 -3.505,16.104 -3.505,13.89 -4.314,13.081 U16.6@-4.314,11.811 ; v1(-4.318,-18.542) v1(-4.318,-18.542) ; v1(2.68,28.556) 3.009,28.227 v1@3.009,26.734 ; U27.6@2.923,-14.478 2.923,-17.934 v1(3.531,-18.542) ; v1(2.997,26.746) v1@3.009,26.734 ; v1(11.158,28.351) 10.235,28.351 10.205,28.321 U13.6@10.205,24.952 10.205,20.852 8.687,19.334 8.687,18.39 10.947,16.129 10.947,13.691 10.207,12.95 U18.6@10.207,11.811 10.207,10.671 10.566,10.312 10.566,3.505 10.947,3.124 10.947,0.644 10.113,-0.191 U23.6@10.113,-1.356 10.113,-2.362 10.439,-2.689 10.439,-8.992 10.846,-9.398 10.82,-14.224 10.164,-14.224 U28.6@10.164,-14.47 10.164,-15.037 10.236,-15.037 10.262,-15.062 10.262,-18.644 12.37,-20.752 12.37,-25.832 12.395,-25.857 13.792,-25.857 13.818,-25.832 13.818,-20.254 17.409,-16.662 ; v1(16.724,17.907) 17.932,17.907 18.313,17.526 18.313,13.966 17.53,13.183 U19.6@17.53,11.819 17.53,3.763 16.815,3.048 16.815,0.426 17.444,-0.203 U24.6@17.444,-1.337 ; v1(16.98,-18.059) 17.409,-17.63 17.409,-16.662 ; v1(17.018,27.432) 17.018,25.378 U14.6@17.444,24.952 ; U29.6@17.409,-14.464 17.409,-16.662
  Bottom Layer w0.152: v1(-11.837,26.797) -14.186,26.797 -14.529,27.14 -14.529,28.816 -14.059,29.286 -5.208,29.286 v1(-4.319,28.397) 2.521,28.397 v1(2.68,28.556) ; v1(-11.684,-20.066) -5.842,-20.066 v1(-4.318,-18.542) v1(3.531,-18.542) 4.013,-18.059 v1(16.98,-18.059) ; v1(2.997,26.746) 4.013,25.73 12.141,25.73 12.573,26.162 12.573,27.114 11.5,28.187 11.322,28.187 v1(11.158,28.351) 15.94,28.351 v1@16.916,27.375 ; v1(16.724,17.907) 16.916,18.099 v1@16.916,27.375 ; v1(17.018,27.432) 16.973,27.432 v1@16.916,27.375